# Altium PCB Wikiot-III.PcbDoc (part 2 of 2)
Units mil, origin at the board's own origin, x right, y up, seen from the top; angles counter-clockwise.
Board outline 3930 x 3935 mil, 2 copper layers (Top Layer, Bottom Layer); 211 components, 261 nets, 942 pads, 236 vias.
Unrouted connection lines stored in the file: 45.
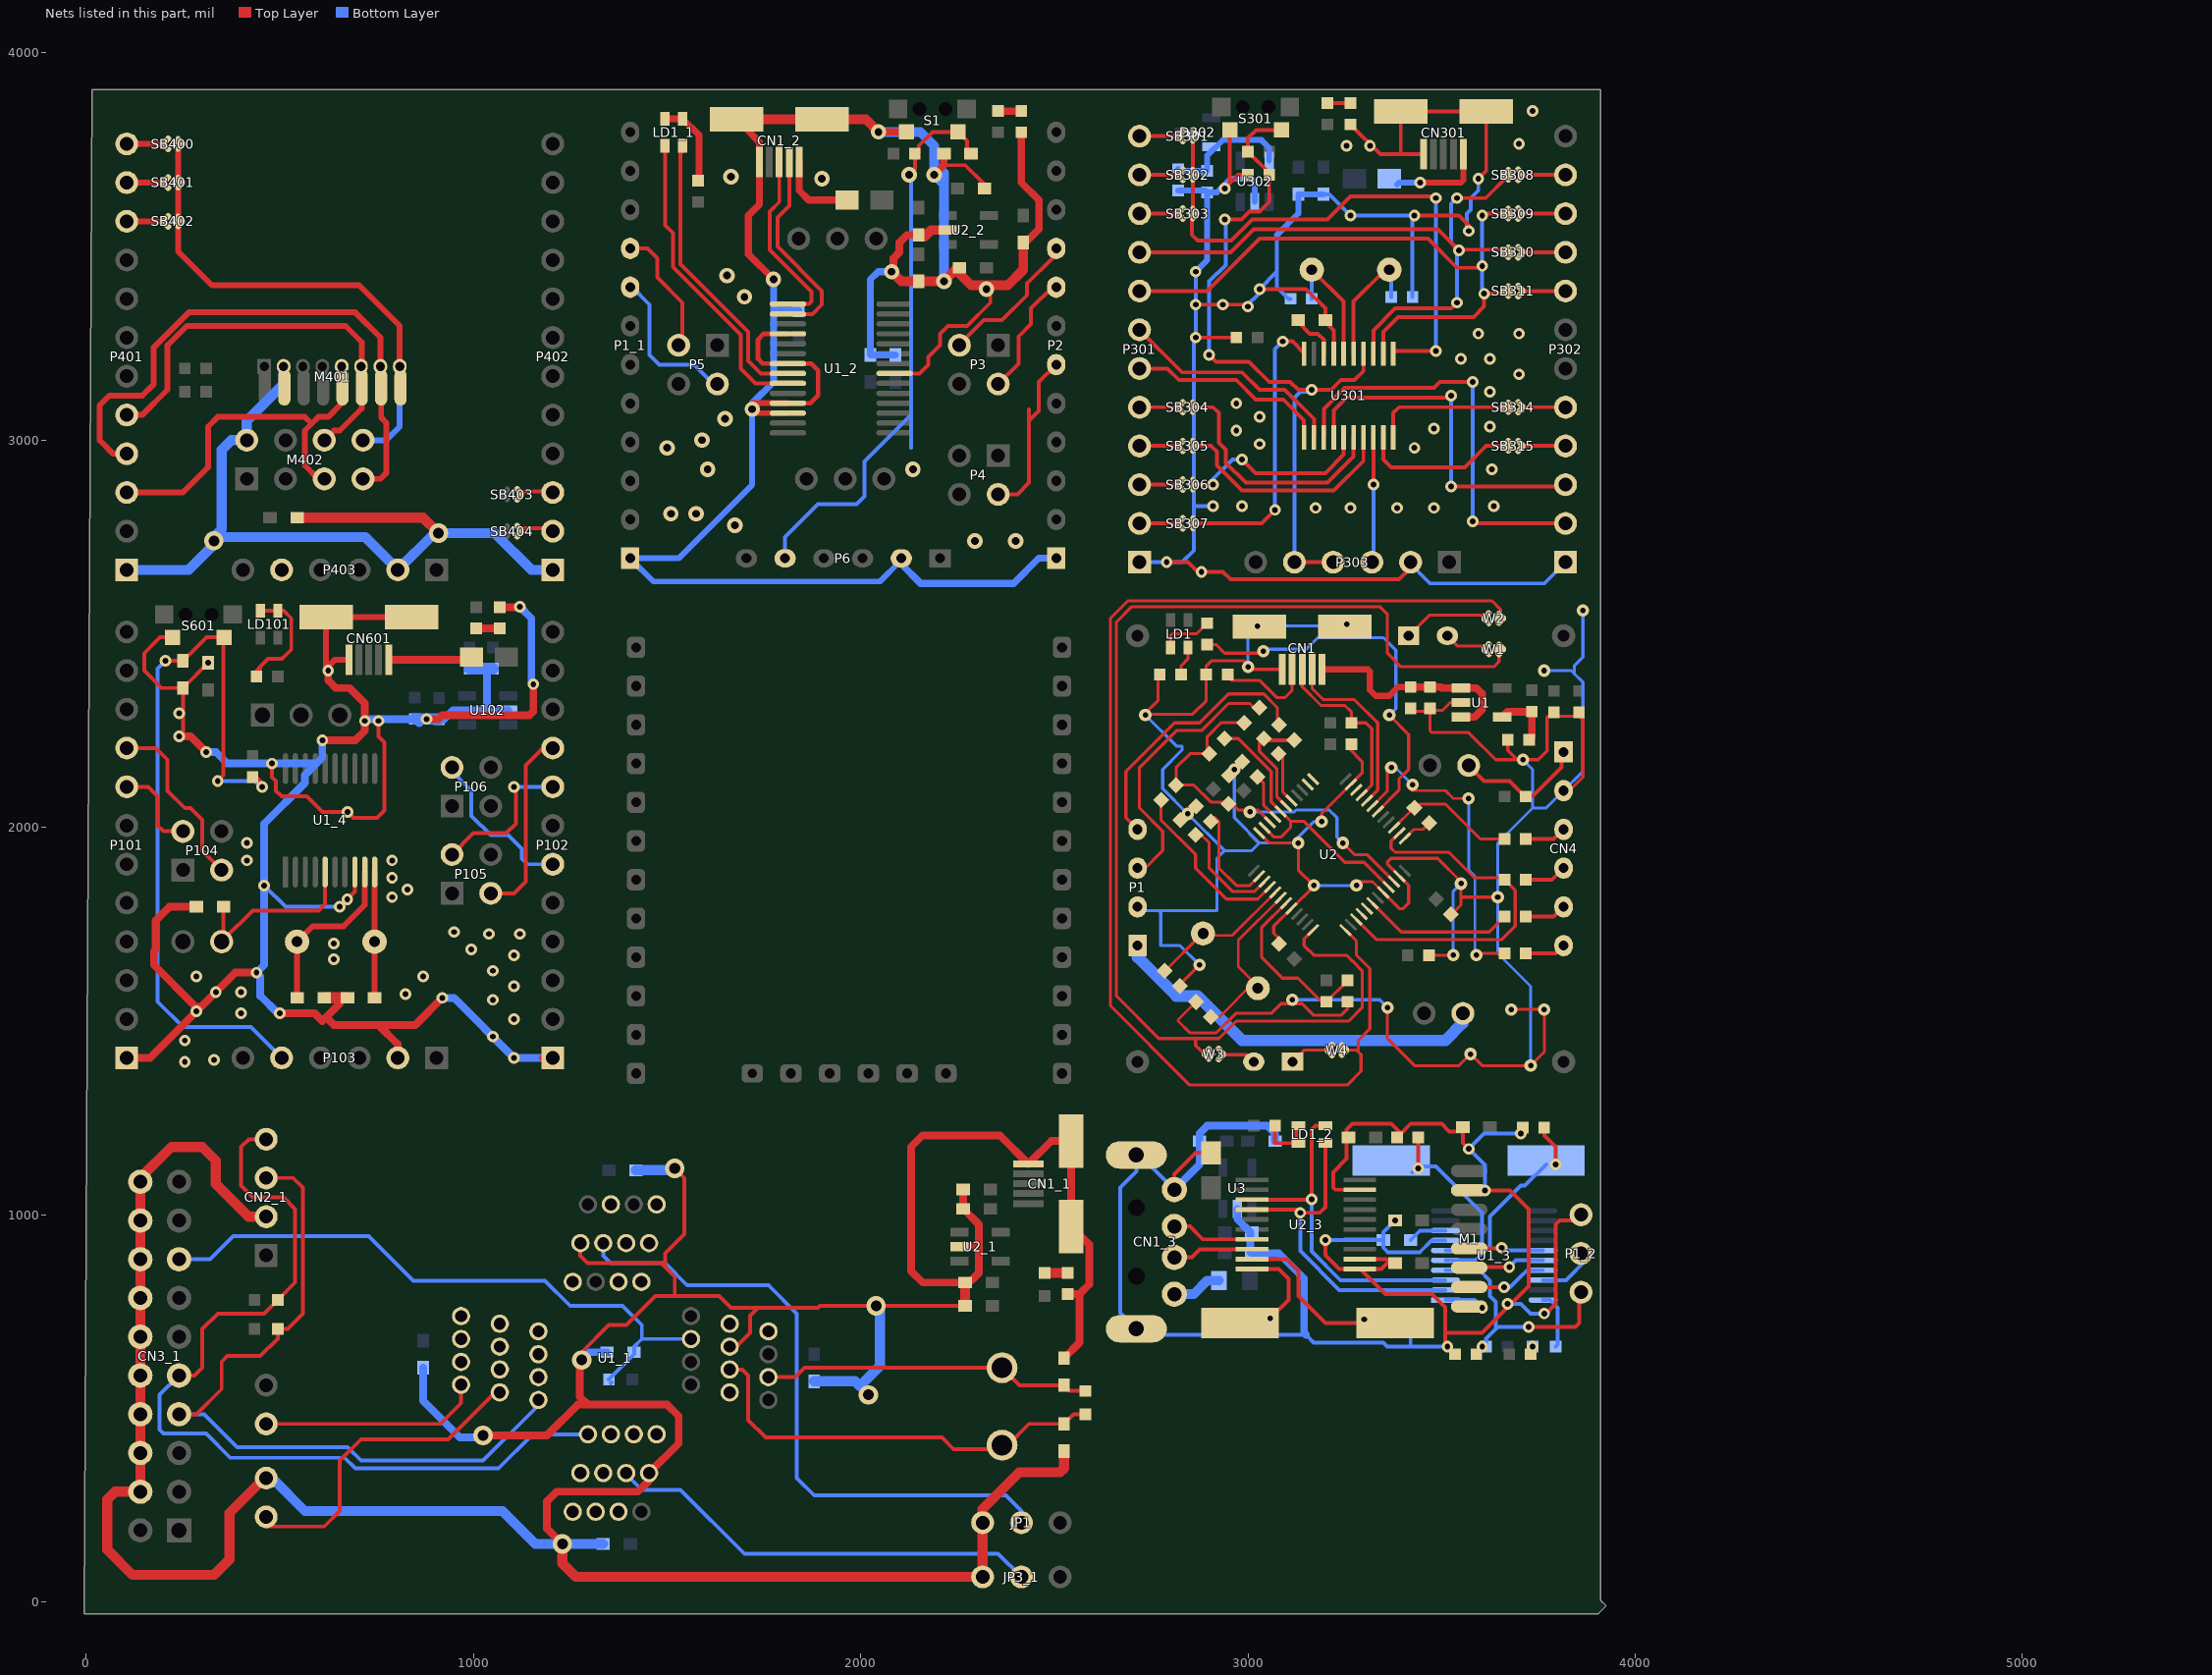
[diagram p2: the nets of this part, all layers, seen from the top]

## Via types
v1: diameter 30, hole 15, Top Layer to Bottom Layer, 149 vias
v2: diameter 32, hole 14, Top Layer to Bottom Layer, 43 vias
v3: diameter 40, hole 20, Top Layer to Bottom Layer, 28 vias
v4: diameter 50, hole 28, Top Layer to Bottom Layer, 16 vias

## Nets (pads, with @x,y where several pads share a name; then routed paths per layer and width w, separated by ;. In a path a pad name is that pad's centre, name@x,y a point inside that pad or via, vN(x,y) a via of type N, cw(c..) or ccw(c..) an arc to the next point about the centre after c; other vN are vias at no path point) (continued)
GND: C1.1 C1_1.1 C1_2.1 C1_3.2 C1_4.1 C2.1 C2_1.1 C2_2.1 C2_3.2 C2_4.2 C3.2 C3_1.1 C3_2.1 C3_3.2 C3_4.2 C4.1 C4_1.1 C4_2.1 C4_3.2 C4_4.2 C5.1 C5_1.1 C5_2.1 C5_3.1 C6.1 C6_1.1 C6_2.1 C6_3.1 C7.1 C7_1.1 C7_2.1 C7_3.1 C8.2 C8_1.1 C8_2.1 C9.1 C9_1.1 C10.1 C11.1 C11_1.1 C12.1 C12_1.1 C13.2 C13_1.1 C13_2.2 C14.1 C14_1.1 C15.1 C15_1.1 C16.1 C100.1 C101.1 C102.1 C103.1 C301.2 C302.2 C303.2 C304.1 C305.1 C306.1 C307.1 C308.1 C309.1 C400.2 C607.1 CN1.0 CN1.5 CN1_1.0 CN1_1.5 CN1_2.0 CN1_2.5 CN1_3.0 CN1_3.4 CN2_1.2 CN3_1.4 CN3_1.6 CN3_1.8 CN3_1.10 CN3_1.12 CN3_1.14 CN3_1.16 CN3_1.18 CN3_1.20 CN4.2 CN301.0 CN301.5 CN601.0 CN601.5 D1.2 D1_1.2 D106.2 D303.2 JP1.3 JP3_1.3 M1.2 M401.2 M402.2 P1.2 P1_1.1 P1_2.1 P2.1 P6.2 P101.1 P102.1 P103.2 P301.1 P302.1 P303.2 P401.1 P402.1 P403.2 R2.1 R3.1 R6.1 R9.2 R15.2 R21.1 R29.1 S1.1 S301.1 S601.1 SB4.2 U1.2 U1_1.8 U1_1.23 U1_1.47 U1_2.7 U1_2.18 U1_2.21 U1_2.25 U1_2.26 U1_3.7 U1_4.8 U2.8 U2.20 U2.23 U2.35 U2.47 U2_1.2 U2_2.2 U2_3.11 U2_3.12 U2_3.19 U3.2 U102.2 U301.7 U302.2 | length 45111.9
  Top Layer w8: R21.1@2772.5,2395 2767.5,2390 2767.5,2327.5 2732.5,2292.5 2857.5,2292.5 2892.5,2327.5 R15.2@2892.5,2390 ; 2820,1500 2850,1470 2918.79,1470 2968.79,1520 3060,1520 3085,1545 3140,1545 3170,1515 3240,1515 3257.5,1532.5 C6.1@3257.5,1550 ; 2820,1503.89 C8.2@2865.55,1549.45 ; C3.2@2824.45,1590.56 2824.45,1594.45 v2(2875,1645) ; R15.2@2892.5,2395 2892.5,2417.5 2905,2430 2990,2430 3011.86,2408.14 CN1.5@3088.76,2408.14 ; R6.1@2985.55,2174.45 R6.1@2990.56,2174.45 ; U2.47@3029.05,1985.68 3054.73,1960 v2(3130,1960) 3130,1890 v2(3170,1850) 3170,1848.24 U2.8@3112.56,1790.81 3066.56,1744.8 3066.56,1726.98 3080.56,1712.98 C7.1@3080.56,1699.45 ; v2(3190,2015) 3190,2035.28 U2.35@3265.68,2110.95 3295,2140.28 3295,2170 C1.1@3260,2205 ; C6.1@3262.5,1547.5 C6.1@3262.5,1550 ; v2@3285,1860 3321.76,1860 U2.20@3349.19,1832.56 3391.76,1790 3400,1790 3415,1805 3415,1850.28 U2.23@3390.95,1874.32 3360,1905.28 3360,1911 3369,1920 3490,1920 3550,1860 3550,1815 ; v2(3360,1535) 3360,1455 3430,1385 3545,1385 v2(3575,1415) 3605,1385 v2(3730,1385) 3765,1420 v2(3765,1530) v2(3680,1530) ; C2.1@3420,2307.5 3420,2300 C5.1@3470,2300 ; R9.2@3467.5,1670 v2(3530,1670) ; C5.1@3470,2307.5 C5.1@3470,2302.5 ; C11.1@3524.45,1775.56 3525.56,1775.56 3550,1800 3550,1815 ; U1.2@3550,2322.6 3522.6,2322.6 3502.5,2302.5 C5.1@3470,2302.5 ; v2(3645,1820) 3555,1820 3550,1815 ; R29.1@3671,2226 3671,2199 v2@3695,2175 ; v2@3760,2400 3765,2395 v2(3765,2405) ; C12.1@3775,2287.5 3772.5,2285 3772.5,2197.5 3750,2175 v2(3710,2175) v2@3695,2175 ; C12.1@3785,2287.5 C13.2@3850,2287.5 ; CN4.2@3815,2095 3830,2095 3865,2130 3865,2277.5 C13.2@3855,2287.5 ; C5.1@3470,2300 3470,2250 3475,2245 3570,2245 3640,2175 v2@3695,2175 ; C5.1@3470,2300 C5.1@3470,2302.5
  Top Layer w10: S601.1@223.07,2490.94 190.94,2490.94 150,2450 150,2405 195,2360 C607.1@250,2360 ; v1(240,2235) 250,2245 C607.1@250,2360 ; v1(315,2425) C607.1@250,2360 ; v1(480,2165) 480,2130 490,2120 490,2095 505,2080 570,2080 610,2040 v1(675,2040) 690,2025 751.72,2025 770,2043.28 770,2220 755,2235 v1(755,2275) ; v1(655,1795) 694.13,1834.13 U1_4.8@694.13,1885 ; U1_1.23@1276.42,926.85 1276.42,893.58 1295,875 1485,875 1495,865 ; v4(1280,625) 1280,645 1350,715 1395,715 1470,790 1520,790 ; v4(1520,1120) 1545,1095 1545,950 1495,900 1495,865 ; U1_1.8@1661.85,659.53 1679.53,659.53 1715,695 1715,740 1735,760 ; U1_2.7@2087.8,3172.2 2152.2,3172.2 2175,3195 2175,3215 2205,3245 2205,3275 2225,3295 2275,3295 2335,3355 v3@2335,3400 ; 2215,3710 2270,3710 C1_2.1@2320,3660 ; C1_1.1@2270,765 v4(2040,765) 1895,765 1890,760 1735,760 ; v1(2790,2685) 2845,2685 2870,2660 v1(2880,2660) 2935.47,2660 2955,2640.47 3390.47,2640.47 3420,2670 P303.2@3420,2685 ; CN1_3.4@2810,1065 2810,1105 2865,1160 C13_2.2@2905,1160 ; v1(2865,3265) C309.1@2970,3265 ; v1(2865,3350) v1(2935,3350) 2995,3350 v1(3000,3345) ; v1(2940,3650) 2953.07,3663.07 ; S301.1@2953.07,3800.94 2953.07,3663.07 ; C308.1@3000,3685 2975,3685 2953.07,3663.07 ; v1(3030,3390) 3150,3390 3200,3340 C303.2@3200,3310 ; v1(3200,935) 3200,895 3235.16,859.84 U2_3.11@3288.94,859.84 U2_3.11@3290.16,859.84 ; C303.2@3200,3305 3221.61,3283.39 U301.7@3221.61,3223.27 ; D303.2@3265,3815 3341.86,3738.14 3396.86,3738.14 ; U2_3.12@3288.94,885.43 3357.07,885.43 3367.5,875 3360,875 3344.84,859.84 U2_3.11@3290.16,859.84 ; U2_3.19@3288.94,1064.57 3225.43,1064.57 3220,1070 3220,1110 3255,1145 3255,1220 3270,1235 3370,1235 3395,1210 3420,1235 3500,1235 3520,1215 3550,1215 3555,1220 3555,1185 v1(3570,1170) ; v1(3430,3580) 3545,3580 3570,3555 v1(3570,3540) ; CN301.5@3453.76,3738.14 3396.86,3738.14 ; C12_1.1@3535,635 3510,660 v1(3515,660) 3508.98,666.02 3508.98,695 ; v1(3595,3675) 3615.17,3695.17 CN301.0@3615.17,3848.46 CN301.0@3394.7,3848.46 3394.7,3740.3 3396.86,3738.14 ; v1(3611.89,1063.11) 3676.89,1063.11 3725,1015 3725,815 3605,695 3508.98,695 ; v1(3705,1210) C2_3.2@3720,1225 ; C2_3.2@3710,1225 C2_3.2@3710,1230 ; v1(3765,745) 3765,740 3795,770 3795,975 3805,985 P1_2.1@3845,985 ; P1_2.1@3860,1000 P1_2.1@3845,985 ; P1_2.1@3875,985 P1_2.1@3845,985 ; 1495,865 1520,840 1520,790 ; 1520,790 1635,790 1665,760 1735,760 ; U2_3.11@3290.16,859.84 3355,795 3475,795 3508.98,761.02 3508.98,695
  Top Layer w12: U1_2.25@1812.2,3095.43 1870,3095.43 1890,3115.43 1890,3180 1872.2,3197.8 U1_2.21@1812.2,3197.8 1747.2,3197.8 1735,3210 1735,3260 1749.57,3274.57 U1_2.18@1812.2,3274.57
  Top Layer w15: CN601.5@678.76,2433.14 642.54,2433.14 619.7,2410.3 CN601.0@619.7,2543.46 CN601.0@840.17,2543.46 ; v3@1710,3085 1720.43,3095.43 U1_2.25@1812.2,3095.43 ; v3@1715.16,3069.84 U1_2.26@1812.2,3069.84
  Top Layer w18: CN1_2.0@1696.58,3811.58 1738.76,3769.4 CN1_2.5@1738.76,3718.14 1738.76,3608.76 1710,3580 1710,3480 v3(1775,3415)
  Top Layer w19: v3(2045.94,3795.94) S1.1@2118.07,3795.94 ; v3(2190,3685) 2215,3710 C9.1@2215,3740 ; D1_1.2@2415,3795 2415,3665 2460,3620 2460,3545 C6_2.1@2420,3505
  Top Layer w20: P101.1@105,1405 165,1405 297.5,1537.5 ; v1(240,2235) 270,2235 v1(310,2195) ; C2_4.2@285,1795 215,1795 180,1760 180,1685 175,1680 175,1645 282.5,1537.5 297.5,1537.5 ; v1(440,1625) 385,1625 297.5,1537.5 ; v1(500,1520) 590,1520 610,1500 620,1510 ; v1(610,2225) 695,2225 720,2250 v1(720,2275) 720,2320 680,2360 645,2360 625,2380 v1(625,2405) ; 655,1560 655,1545 620,1510 ; P103.2@805,1405 805,1440 755,1490 ; v1(879.58,2280) 910,2280 920,2290 1145,2290 1155,2300 v1(1155,2370) ; v1(920,1560) 850,1490 755,1490 ; v4(1025,430) 1190,430 1270,510 1295,510 ; D106.2@1068.36,2568.92 1118.92,2568.92 v1(1120,2570) ; P102.1@1180,1405 P102.1@1205,1405 ; v4(1230,150) 1190,190 1190,260 1215,285 1425,285 1453.58,313.58 U1_1.47@1453.58,333.15 1530,409.57 1530,480 1500,510 1295,510 ; v4(1280,625) 1275,625 1275,530 1295,510 ; v3@2085,3430 2085,3470 2100,3485 2100,3510 2120,3530 C8_1.1@2150,3530 ; U2_1.2@2255,917.6 2297.4,917.6 2305,910 ; C4_1.1@2265,1065 C2_1.1@2265,1015 2305,975 2305,910 ; C5_1.1@2270,815 2305,850 2305,910 ; C5_1.1@2280,825 2160,825 2130,855 2130,1175 2160,1205 2359.39,1205 CN1_1.5@2433.14,1131.24 ; CN1_1.5@2438.45,1136.55 2492.2,1190.3 CN1_1.0@2543.46,1190.3 CN1_1.0@2543.46,969.83 2590,923.28 2590,820 2565,795 ; C7_1.1@2525,630 2565,670 2565,795 ; D1.2@2535,795 2565,795 ; 620,1510 640,1490 755,1490
  Top Layer w25: CN1_2.0@1696.58,3811.58 CN1_2.0@1679.7,3828.46 CN1_2.0@1900.17,3828.46 2013.43,3828.46 v3(2045.94,3795.94) ; v3@2085,3430 2105,3410 C7_2.1@2150,3410 v3(2215,3410) C5_2.1@2252.5,3447.5 ; 2165,3525 2182.6,3542.6 U2_2.2@2225,3542.6 ; C5_2.1@2255,3430 2285,3400 2335,3400 2380,3400 2420,3440 C6_2.1@2420,3505
  Top Layer w26: v4(330,2740) v4@330,2750 ; SB4.2@465,320 460,320 370,230 370,200 370,110 330,70 245,70 120,70 55,135 55,265 75,285 CN3_1.4@140,285 CN3_1.6@140,385 CN3_1.8@140,485 CN3_1.10@140,585 CN3_1.12@140,685 CN3_1.14@140,785 CN3_1.16@140,885 CN3_1.18@140,985 CN3_1.20@140,1085 140,1095 220,1175 300,1175 335,1140 335,1080 420,995 CN2_1.2@465,995 ; C400.2@545,2800 870,2800 v4(910,2760) ; v4(1230,150) 1230,100 1265,65 JP3_1.3@2315,65 JP1.3@2315,205 2315,240 2410,335 2515,335 2525,345 C6_1.1@2525,390 ; C1_1.1@2270,765 C5_1.1@2270,815
  Top Layer w30: C3_4.2@615,1560 655,1560 C4_4.2@675,1560
  Bottom Layer w8: P1.2@2715,1795 2725,1785 2770,1785 ; v2(2735,2290) 2815,2210 2830,2210 2830,2200 2780,2150 2780,2100 v2(2845,2035) 2940,1940 ; v2(2875,1645) 2825,1695 2775,1695 2775,1780 2770,1785 ; v2(2965,2150) 2965,2025 3030,1960 ; v2(3000,2415) 3000,2505 3015,2520 v2(3025,2520) 3250,2520 v2(3255,2525) ; v2(3115,1555) 3340,1555 v2(3360,1535) ; v2(3170,1850) v2(3280,1850) ; v2(3190,2015) 3170,2015 3130,1975 v2(3130,1960) 3030,1960 ; v2(3530,1670) 3530,1835 v2(3550,1855) ; v2(3710,2175) 3735,2150 3735,2050 ; v2(3730,1385) 3730,1590 3645,1675 v2(3645,1820) 3645,1960 3735,2050 ; v2(3765,2405) 3835,2405 3842.5,2397.5 ; v2(3865,2560) 3865,2440 3842.5,2417.5 3842.5,2397.5 ; 2770,1785 2920,1785 2920,1920 2940,1940 ; 2940,1940 3010,1940 3030,1960 ; 3735,2050 3770,2050 CN4.2@3815,2095 3865,2145 3865,2375 3842.5,2397.5
  Bottom Layer w10: v1(460,1850) 515,1795 v1(655,1795) ; P301.1@2720,2685 2830,2685 ; v1(2790,2685) 2830,2685 ; CN1_3.4@2810,1065 2720.61,1154.39 CN1_3.0@2711.65,1154.39 2711.65,1111.65 2670,1070 2670,747.23 CN1_3.0@2711.65,705.57 2727.23,690 2930,690 ; v1(2865,3435) v1(2865,3350) v1(2865,3265) 2860,3260 2860,2830 ; v1(2910,2830) 2860,2830 ; C7_3.1@2935,735 2935,695 2930,690 ; v1@2940,3640 v1(2940,3650) ; v1@2995,3345 3030,3380 v1(3030,3390) 3075,3435 ; 3075,3445 3075,3435 ; 3075,3530 3075,3435 ; C302.2@3110,3365 3105,3365 3075,3395 3075,3435 ; C307.1@3195,3635 3210,3635 v1(3265,3580) v1(3430,3580) 3425,3575 C301.2@3425,3370 ; v1(3200,935) C4_3.2@3350,935 ; v1(3380,985) 3350,955 C4_3.2@3350,935 ; C6_3.1@3420,730 3420,665 3415,660 ; P303.2@3420,2685 3420,2680 3470,2630 3765,2630 P302.1@3820,2685 ; U1_3.7@3510,933.54 3474.08,933.54 3444.08,903.54 3361.46,903.54 3350,915 C4_3.2@3350,935 ; v1(3515,660) 3415,660 ; v1(3570,3540) 3565,3545 3565,3585 3575,3595 3575,3625 3595,3645 v1(3595,3675) ; v1(3611.89,1063.11) 3611.89,1128.11 v1(3570,1170) 3610,1210 v1(3705,1210) ; v1(3670,770) 3705,770 3730,745 v1(3765,745) ; 2830,2685 2860,2715 2860,2830 ; 2930,690 3150,690 3170,670 3350,670 3360,660 3415,660
  Bottom Layer w15: v3(1720,3080) 1720,2885 1530,2695 P1_1.1@1405,2695 1465,2635 2050,2635 P6.2@2100,2685 ; P6.2@2105,2680 P6.2@2105,2695 ; C304.1@2820,3645 2890,3645 C305.1@2895,3640 ; v1(2865,3435) 2895,3465 C305.1@2895,3640 ; U302.2@3017.6,3615 3017.6,3667.4 3010,3675 2955,3675 2920,3640 C305.1@2895,3640 ; 3075,3530 3130,3585 C306.1@3130,3635 C307.1@3195,3635
  Bottom Layer w18: v3(1720,3080) 1720,3095 1775,3150 v3(1775,3415) ; 1775,3335 C4_2.1@1840,3335 ; v3(2080,3435) 2045,3435 2025,3415 C2_2.1@2025,3220 C3_2.1@2090,3220 ; P6.2@2105,2680 2155,2630 2395,2630 2460,2695 P2.1@2505,2695
  Bottom Layer w20: v1(310,2195) 335,2195 365,2165 v1(480,2165) 595,2165 ; v1(500,1520) 495,1520 450,1565 450,1615 v1(440,1625) 460,1645 v1(460,1850) 460,2010 565,2115 565,2135 595,2165 ; v1(610,2225) 610,2180 595,2165 ; v1(720,2275) 725,2280 C103.1@848.8,2280 860,2268.8 871.2,2280 v1(879.58,2280) ; C16.1@870,605 870,520 965,425 1020,425 v4(1025,430) ; C102.1@911.44,2278.92 923.92,2278.92 947.6,2302.6 1025,2302.6 ; v1(920,1560) 950,1560 v1(1105,1405) P102.1@1205,1405 ; C100.1@1035,2410 1035,2312.6 1025,2302.6 ; U102.2@1090,2302.6 1025,2302.6 ; v1(1120,2570) 1150,2540 1150,2375 v1(1155,2370) ; v4(1280,625) 1300,645 C3_1.1@1345,645 ; CN1_3.4@2810,1065 2875,1130 C11_1.1@2875,1190 2875,1210 2895,1230 3050,1230 3070,1210 C8_2.1@3070,1190 ; U3.2@2972.6,1015 2972.6,988.68 3006.28,955 3006.28,903.72 C9_1.1@3010,900 3080,900 3145,835 3145,695 3150,690
  Bottom Layer w25: v3(2045.94,3795.94) 2154.06,3795.94 2190,3760 v3(2190,3685) 2215,3660 ; v3(2215,3410) 2215,3690
  Bottom Layer w26: P401.1@105,2665 265,2665 v4@325,2725 ; SB4.2@485,315 565,235 1075,235 1160,150 v4(1230,150) 1235,155 1240,150 C14.1@1335,150 ; M401.2@510,3190 510,3145 415,3050 M402.2@415,3000 375,3000 350,2975 350,2770 325,2745 v4@325,2725 ; v4@925,2760 v4(910,2760) ; P402.1@1205,2665 1150,2665 1055,2760 v4(910,2760) ; C13_1.1@1420,1115 1515,1115 v4(1520,1120) ; C15.1@1880,570 1985,570 1997.5,557.5 2050,610 2050,755 v4(2040,765) ; v4@325,2725 350,2750 720,2750 P403.2@805,2665 900,2760 v4(910,2760)
  Bottom Layer w30: C103.1@848.8,2280 910.36,2280 C102.1@911.44,2278.92 ; C101.1@990,2410 1030,2410 ; C100.1@1035,2410 C100.1@1050,2410
  other v1: 255,1395 330,1400 255,1450 1050,1460 1105,1505 400,1520 285,1525 1050,1555 825,1570 335,1575 400,1575 1105,1590 285,1615 870,1615 1050,1630 640,1660 1105,1670 995,1685 640,1700 1040,1725 1120,1725 950,1730 674.57,1814.57 790,1820 830,1840 790,1870 415,1915 790,1915 415,1960 240,2295 3175,2825 3265,2825 3385,2825 3480,2825 2985,2830 3635,2830 3630,2925 3430,2980 3030,2990 2970,3025 3480,3030 3625,3035 3030,3060 2970,3095 3625,3125 3700,3170 3550,3210 3625,3210 3595,3275 3700,3275 3255,3760 3315,3760 3700,3765 3735,3850
  other v3: 2295,2740 2400,2740 1675,2780 1510,2810 1575,2810 1605,2925 2135,2925 1500,2980 1590,3000 1650,3055 1700,3370 2325,3390 1655,3425 1900,3675 1665,3680
  other v4: 2020,535
GPIO1: U1_1.2
GPIO2: U1_1.25
GPIO3: U1_1.28
GPIO4: U1_1.27
GPIO5: U1_1.26
GPIO6: JP1.2 U1_1.20 | length 1664
  Bottom Layer w10: U1_1.20@1335.47,926.85 1335.47,894.53 1355,875 1495,875 1552.5,817.5 1762.5,817.5 1835,745 1835,320 1880,275 2375,275 2415,235 JP1.2@2415,205
GPIO7: U1_1.40
INT0: M1.8 M401.8 M402.8 SB400.2 SB401.2 SB402.2 U1_3.1 | length 1433
  Top Layer w10: M1.8@3571.23,763.11 M1.8@3611.89,763.11
  Top Layer w15: SB400.2@238,3755 SB401.2@238,3665 238,3487 325,3400 705,3400 810,3295 M401.8@810,3190
  Bottom Layer w10: U1_3.1@3510,780 3585,780 v1(3605,760)
  Bottom Layer w15: M402.8@715,3000 775,3000 810,3035 M401.8@810,3190
LDR_AD: 
LED: R3_2.1 U1_3.20 | length 148.4
  Bottom Layer w10: U1_3.20@3761.97,780 3780,780 3800,760 3800,665 R3_2.1@3795,660
LED_STLINK: R20.1 U2.30 | length 1003.6
  Top Layer w8: R20.1@2895,2472.5 2917.5,2472.5 2940,2450 3035,2450 v2(3040,2455) ; U2.30@3335.28,2041.36 3390,2096.08 3390,2125 3415,2150 3415,2240 v2(3365,2290)
  Bottom Layer w8: v2(3040,2455) 3045,2460 3150,2460 3180,2490 3350,2490 3382,2458 3382,2307 v2(3365,2290)
MISO: M1.7 M401.7 M402.7 P401.4 U1_3.17 | length 1658
  Top Layer w10: M1.7@3571.23,813.11 v1(3661.89,813.11)
  Top Layer w15: P401.4@105,2965 70,2965 35,3000 35,3090 60,3115 145,3115 175,3145 175,3239.7 265.3,3330 695,3330 760,3265 M401.7@760,3190 ; M402.7@715,2900 760,2900 775,2915 775,3045 761.89,3058.11 M401.7@761.89,3136.23
  Bottom Layer w10: v1(3661.89,813.11) 3676.95,813.11 3705,841.16 3720.61,856.77 U1_3.17@3761.97,856.77
MOSI: M1.6 M401.6 M402.6 P401.5 U1_3.16 | length 1287.6
  Top Layer w10: M1.6@3571.23,863.11 3573.12,865 v1(3675,865)
  Top Layer w15: P401.5@105,3065 145,3065 210,3130 210,3245 260,3295 670,3295 711.89,3253.11 M401.6@711.89,3136.23 711.89,3081.89 655,3025 640,3025 M402.6@615,3000
  Bottom Layer w10: v1(3675,865) 3692.36,882.36 U1_3.16@3761.97,882.36
NACT: 
NetC2_1: C2_3.1 C2_4.1 JP1_2.1 U1_3.5 U1_4.5 X1_1.2 | length 989.3
  Top Layer w10: JP1_2.1@350,1705 JP1_2.1@355,1710 ; C2_4.1@355,1795 JP1_2.1@355,1710 ; U1_4.5@617.36,1885 617.36,1802.36 600,1785 430,1785 JP1_2.1@355,1710 ; C2_3.1@3765,1225 3765,1205 3795,1175 v1(3795,1130)
  Bottom Layer w10: U1_3.5@3510,882.36 3587.36,882.36 3625,920 3625,995 3705,1075 3715,1075 X1_1.2@3770,1130
NetC3_1: C3_3.1 C3_4.1 U1_3.6 U1_4.9 X1_1.1 Y1_1.2 | length 939.3
  Top Layer w10: v1(3440,1120) C3_3.1@3440,1200
  Top Layer w15: C3_4.1@545,1560 Y1_1.2@545,1705 585,1745 665,1745 719.72,1799.72 U1_4.9@719.72,1885
  Bottom Layer w10: X1_1.1@3425,1110 3440,1125 3485,1125 3605,1005 3605,930 3582.95,907.95 U1_3.6@3510,907.95
NetC4_1: C4_3.1 C4_4.1 U1_3.8 U1_4.10 Y1_1.1 | length 425.1
  Top Layer w15: C4_4.1@745,1560 Y1_1.1@745,1705 745.32,1705.32 U1_4.10@745.32,1885
  Bottom Layer w10: C4_3.1@3420,935 3444.13,959.13 U1_3.8@3510,959.13
NetC6_2: C6_1.2 C6_3.2 R6_1.1 U1_1.5 U2_3.9 X2.2 Y1.1 | length 1687.6
  Top Layer w10: U1_1.5@1661.85,600.47 1694.53,600.47 1710,585 1710,470 1755,425 2210,425 2240,395 2355,395 X2.2@2365,405 2380,405 2435,460 C6_1.2@2525,460 2550,485 R6_1.1@2580,485 ; U2_3.9@3011.06,885.43 3099.57,885.43 3130,855 3130,790 3200,720 Y1.1@3300,720 ; v1(3300,730) 3370,730 Y1.1@3380,720 ; Y1.1@3300,750 Y1.1@3350,750
  Bottom Layer w10: v1(3300,730) C6_3.2@3350,730
NetC7_2: C7_1.2 C7_3.2 R6_1.2 U1_1.6 U2_3.10 X2.1 Y1.2 | length 1140
  Top Layer w10: U1_1.6@1761.85,580.79 1830.79,580.79 1855,605 X2.1@2365,605 2410,560 C7_1.2@2525,560 2540,545 R6_1.2@2580,545 ; U2_3.10@3011.06,859.84 3080.16,859.84 3105,835 3105,780 v1(3057.5,732.5)
  Bottom Layer w10: C7_3.2@3005,735 3025,735 3030,730 3060,730 v1(3057.5,732.5)
NetC112_2: 
NetC113_2: 
NetC301_1: C301.1 U301.5 X301.2 | length 357.9
  Top Layer w10: U301.5@3272.8,3223.27 3272.8,3357.8 3355,3440 X301.2@3365,3440 X301.2@3365,3415
  Bottom Layer w10: X301.2@3365,3440 3370,3435 C301.1@3370,3370
NetC302_1: C302.1 U301.6 X301.1 | length 325.8
  Top Layer w10: X301.1@3165,3440 3247.2,3357.8 U301.6@3247.2,3223.27
  Bottom Layer w10: C302.1@3165,3365 X301.1@3165,3440
NetC303_1: C303.1 U301.8 | length 120.8
  Top Layer w10: C303.1@3130,3305 3160,3275 3180,3275 3196.02,3258.98 U301.8@3196.02,3223.27
NetC304_2: C304.2 C305.2 D302.2 U302.5 | length 335.6
  Bottom Layer w15: C304.2@2820,3700 2825,3695 C305.2@2895,3695 2895,3735 2935,3775 3035,3775 3055,3755 U302.5@3055,3721.3
NetC601_2: 
NetC605_2: 
NetC606_2: 
NetC607_1: 
NetC701_2: 
NetC702_2: 
NetC703_2: 
NetC802_1: 
NetC803_1: 
NetCN1_1: CN1_2.1 CN1_3.1 F1.2 F1_1.2 | length 336.9
  Top Layer w18: CN1_2.1@1841.12,3718.14 1841.12,3645 1866.12,3620
  Top Layer w20: 1866.12,3620 F1.2@1965,3620
  Bottom Layer w25: CN1_3.1@2810,795 2860,795 2895,830 F1_1.2@2925,830
NetCN1_2: CN1_2.2 CN1_3.2 U1_2.16 U2_3.8 | length 736
  Top Layer w10: U1_2.16@1812.2,3325.75 1875.75,3325.75 1900,3350 1900,3385 1785,3500 1785,3575 1815.53,3605.53 CN1_2.2@1815.53,3718.14 ; CN1_3.2@2810,890 2855,890 2876.02,911.02 U2_3.8@3011.06,911.02
NetCN1_3: CN1_2.3 CN1_3.3 U1_2.15 U2_3.7 | length 693.8
  Top Layer w10: CN1_2.3@1789.94,3718.14 1789.94,3614.94 1765,3590 1765,3491.72 1873.17,3383.55 1873.17,3358.17 1866.34,3351.34 U1_2.15@1812.2,3351.34 ; CN1_3.3@2810,970 2850,970 2883.39,936.61 U2_3.7@3011.06,936.61
NetCN1_4: CN1.4 R15.1 | length 251.4
  Top Layer w8: R15.1@2947.5,2390 2957.5,2380 3030,2380 3075,2335 3095,2335 3114.35,2354.35 CN1.4@3114.35,2408.14
NetCN2_1: CN2.1 W2.1 | length 224
  Top Layer w8: CN2.1@3415,2495 3468,2548 W2.1@3617,2548
NetCN2_2: CN2.2 W1.1 | length 113.2
  Top Layer w8: CN2.2@3515,2495 3542,2468 W1.1@3617,2468
NetCN3_1: CN3.1 W4.1 | length 112.7
  Top Layer w8: CN3.1@3115,1395 3145,1425 3204,1425 W4.1@3212,1433
NetCN3_2: CN3.2 W3.1 | length 79.5
  Top Layer w8: W3.1@2943,1413 2997,1413 CN3.2@3015,1395
NetCN4_1: CN4.1 JP2.2 R1.2 | length 347.3
  Top Layer w10: JP2.2@3570,2160 3610,2120 3675,2120 R1.2@3717.5,2077.5 ; R1.2@3717.5,2080 3735,2080 3810,2155 3810,2190 CN4.1@3815,2195
NetCN4_3: CN4.3 R5.1 | length 107.9
  Top Layer w10: R5.1@3717.5,1970 3790,1970 CN4.3@3815,1995
NetCN4_4: CN4.4 R8.1 | length 109.9
  Top Layer w10: R8.1@3717.5,1865 3785,1865 CN4.4@3815,1895
NetCN4_5: CN4.5 R13.1 | length 107.9
  Top Layer w10: R13.1@3717.5,1770 3790,1770 CN4.5@3815,1795
NetCN4_6: CN4.6 R10.1 | length 105.8
  Top Layer w10: R10.1@3717.5,1675 3795,1675 CN4.6@3815,1695
NetCN101_1: 
NetCN101_2: 
NetCN101_3: 
NetCN301_1: CN301.1 F301.2 | length 242.7
  Top Layer w15: v1(3445,3665) 3550,3665 3556.12,3671.12 CN301.1@3556.12,3738.14
  Bottom Layer w15: F301.2@3385,3660 3390,3665 v1(3445,3665)
NetCN601_1: CN601.1 F601.2 | length 207.8
  Top Layer w20: 790,2433.14 988.14,2433.14 F601.2@995,2440
NetCN601_2: 
NetCN601_3: 
NetD1_1: D1.1 D1_1.1 R2_1.1 R10_1.2 | length 110
  Top Layer w19: R2_1.1@2355,3850 D1_1.1@2415,3850
  Top Layer w25: R10_1.2@2480,850 D1.1@2530,850
NetD1_2: D1_2.2 R3_2.2 | length 22.1
  Top Layer w10: D1_2.2@3730,640 3730,655 v1(3735,660)
NetD106_1: D106.1 R101.1 | length 61
  Top Layer w20: R101.1@1007.36,2513.92 D106.1@1068.36,2513.92
NetD303_1: D303.1 R303.1 | length 60
  Top Layer w10: R303.1@3205,3870 D303.1@3265,3870
NetD601_2: 
NetD702_2: 
NetJP1_2: 
NetJP3_2: JP3.2 JP3_1.2 P1.1 U1_1.44 | length 2141.8
  Bottom Layer w10: U1_1.44@1394.53,333.15 1394.53,330.47 1435,290 1535,290 1700,125 2355,125 JP3_1.2@2415,65
  Bottom Layer w30: P1.1@2715,1695 2715,1665 2815,1565 2870,1565 2985,1450 3510,1450 3555,1495 JP3.2@3555,1520 ; JP3.2@3552.5,1520 3552.5,1522.5 JP3.2@3555,1525
NetJP4_2: 
NetJP801_2: 
NetLD1_1: LD1.1 R21.2 | length 82.2
  Top Layer w8: R21.2@2827.5,2395 2827.5,2417.5 2845,2435 LD1.1@2845,2470
NetLD1_2: LD1.2 R20.2 | length 133.5
  Top Layer w7: LD1.2@2800,2470 2800,2495 2805,2500 2867.5,2500 R20.2@2895,2527.5
NetLD1_3: LD1_1.3 LD1_1.4 LD1_2.3 LD1_2.4 R1_1.2 R7_2.2 | length 368.6
  Top Layer w10: R7_2.2@3070,1230 3070,1185 LD1_2.3@3130,1185 ; LD1_2.3@3125,1185 LD1_2.4@3125,1230
  Top Layer w18: LD1_1.3@1500,3830 LD1_1.4@1540,3830 1582.5,3787.5 1582.5,3672.5 R1_1.2@1580,3670
NetLD101_3: LD101.3 LD101.4 R102.2 | length 305.2
  Top Layer w10: LD101.3@450,2560 LD101.4@495,2560 510,2560 530,2540 530,2460 515,2445 505,2435 470,2435 450,2415 ; 450,2415 450,2410 440,2400 440,2405 450,2415
NetLD601_3: 
NetM401_3: 
NetP1_3: P1.3 R18.2 | length 692.7
  Top Layer w8: P1.3@2730,1890 2780,1940 2780,1990 2720,2050 2720,2155 2815,2250 2880,2250 2950,2320 3005,2320 3015.55,2309.45 R18.2@3029.45,2309.45
NetP1_4: P1.4 R22.2 | length 705.9
  Top Layer w8: P1.4@2715,1995 2685,2025 2685,2145 2810,2270 2875,2270 2950,2345 3040.55,2345 3075.55,2310 R22.2@3075.55,2259.45 ; P1.4@2725,2005 P1.4@2730,2005
NetP201_6: 
NetP201_7: 
NetP201_11: 
NetP201_12: 
NetP202_2: 
NetP202_3: 
NetP202_4: 
NetP202_6: 
NetP202_7: 
NetP202_10: 
NetP202_11: 
NetP301_2: P301.2 SB307.1 | length 110.1
  Top Layer w10: P301.2@2720,2785 2818.4,2785 SB307.1@2826.7,2776.7
NetP301_3: P301.3 SB306.1 | length 110.1
  Top Layer w10: P301.3@2720,2885 2818.4,2885 SB306.1@2826.7,2893.3
NetP301_4: P301.4 SB305.1 | length 93.4
  Top Layer w10: P301.4@2720,2985 2813.4,2985
NetP301_5: P301.5 SB304.1 | length 108.1
  Top Layer w10: P301.5@2720,3085 2823.4,3085 SB304.1@2826.7,3088.3
NetP301_10: P301.10 SB303.1 | length 110.1
  Top Layer w10: P301.10@2720,3585 2818.4,3585 SB303.1@2826.7,3593.3
NetP301_11: P301.11 SB302.1 | length 110.1
  Top Layer w10: P301.11@2720,3685 2818.4,3685 SB302.1@2826.7,3693.3
NetP301_12: P301.12 SB301.1 | length 110.1
  Top Layer w10: P301.12@2720,3785 2818.4,3785 SB301.1@2826.7,3776.7
NetP302_4: P302.4 SB315.1 | length 118.1
  Top Layer w10: SB315.1@3703.3,2988.3 3706.6,2985 P302.4@3820,2985
NetP302_5: P302.5 SB314.1 | length 120.1
  Top Layer w10: SB314.1@3703.3,3093.3 3711.6,3085 P302.5@3820,3085
NetP302_8: P302.8 SB311.1 | length 110
  Top Layer w10: SB311.1@3710,3385 P302.8@3820,3385
NetP302_9: P302.9 SB310.1 | length 120.1
  Top Layer w10: SB310.1@3703.3,3493.3 3711.6,3485 P302.9@3820,3485
NetP302_10: P302.10 SB309.1 | length 120.1
  Top Layer w10: SB309.1@3703.3,3593.3 3711.6,3585 P302.10@3820,3585
NetP302_11: P302.11 SB308.1 | length 120.1
  Top Layer w10: SB308.1@3703.3,3693.3 3711.6,3685 P302.11@3820,3685
NetP401_10: P401.10 SB402.1 | length 99
  Top Layer w15: P401.10@105,3565 SB402.1@204,3565
NetP401_11: P401.11 SB401.1 | length 105.3
  Top Layer w15: P401.11@105,3665 199,3665 SB401.1@207,3673
NetP401_12: P401.12 SB400.1 | length 95
  Top Layer w15: P401.12@105,3765 SB400.1@200,3765
NetP402_2: P402.2 SB404.1 | length 90.3
  Top Layer w10: SB404.1@1118,2773 1197,2773 P402.2@1205,2765
NetP402_3: P402.3 SB403.1 | length 88.2
  Top Layer w10: SB403.1@1118,2868 1202,2868 P402.3@1205,2865
NetP701_6: 
NetP701_7: 
NetP701_10: 
NetP701_11: 
NetP701_12: 
NetP801_2: 
NetP801_3: 
NetP801_4: 
NetP801_5: 
NetP801_10: 
NetP801_11: 
NetP801_12: 
NetP802_4: 
NetP802_5: 
NetP802_6: 
NetP802_7: 
NetP802_8: 
NetP802_9: 
NetP802_10: 
NetP802_11: 
NetR2_2: R2.2 U2.3 | length 279.7
  Top Layer w8: R2.2@2874.45,1985.56 2900,1960 2900,1894.54 2959.54,1835 3017.56,1835 U2.3@3042.97,1860.4
NetR3_2: R3.2 U2.2 | length 267.5
  Top Layer w8: R3.2@2914.45,2025.55 2925,2015 2925,1895 2969.77,1850.23 3004.95,1850.23 U2.2@3029.05,1874.32
NetR6_2: R6.2 U2.44 | length 122.3
  Top Layer w8: R6.2@3024.45,2130.56 3040,2115 3040,2058.24 U2.44@3070.81,2027.44
NetR10_2: 
NetR16_2: 
NetR28_2: R28.2 R29.2 U1.4 | length 158.3
  Top Layer w20: U1.4@3656.3,2285.2 3670.1,2299 R28.2@3733,2299 3733,2233 R29.2@3726,2226
NetR604_2: 
NetU701_3: 
NRST: C3_1.2 C9.2 C12_1.2 C308.2 C607.2 CN3_1.15 P1_2.3 P6.5 P103.5 P303.4 P303.5 P403.5 R3_1.2 R4_1.1 R5_1.1 R302.1 R603.2 S1.2 S301.2 S601.2 U1_1.7 U1_3.4 U301.4 | length 7643.7
  Top Layer w10: v1(205,2430) C607.2@250,2430 310.94,2490.94 S601.2@356.93,2490.94 355,2489.02 355,2135 v1(340,2120) ; R603.2@440,2130 455,2115 v1(455,2105) ; v3(2125,3685) 2140,3700 R3_1.2@2140,3740 ; R3_1.2@2150,3740 2150,3760 2185.94,3795.94 S1.2@2251.93,3795.94 2275,3772.87 C9.2@2275,3740 ; v1(2900,3220) 2917.5,3202.5 3002.5,3202.5 3055,3150 3108.28,3150 ; v1(2940,3570) 2983.43,3570 3003.43,3590 3030,3590 3055,3615 C308.2@3055,3685 3055,3690 R302.1@3000,3745 3000,3780 3020.94,3800.94 S301.2@3086.93,3800.94 ; 3109.14,3150.86 3130,3130 v1(3165,3130) 3215,3130 3240,3155 3275,3155 3298.39,3178.39 U301.4@3298.39,3223.27 ; P303.5@3120,2685 P303.4@3220,2685 ; C12_1.2@3590,640 3590,645 v1(3605,660) ; v1(3725,710) 3845,710 3855,720 3855,795 P1_2.3@3860,800
  Bottom Layer w10: v1(205,2430) 185,2410 185,1550 250,1485 425,1485 P103.5@505,1405 ; CN3_1.15@240,885 320,885 380,945 730,945 845,830 1185,830 1250,765 1385,765 1435,715 1435,679.21 ; v1(340,2120) 435,2120 455,2100 v1(455,2105) ; R5_1.1@1350,575 1415,640 C3_1.2@1415,645 1415,659.21 1435,679.21 ; R5_1.1@1355,565 R5_1.1@1357.5,567.5 ; U1_1.7@1561.85,679.21 1435,679.21 ; P6.5@1805,2695 1805,2750 1890,2835 1990,2835 2010,2855 2010,2945 2130,3065 ; v3(2125,3685) 2130,3680 2130,2980 ; v1(2900,3220) 2900,3250 2900,3410 2942.5,3452.5 2942.5,3567.5 v1(2940,3570) ; P303.5@3120,2685 3120,3110 3135,3125 3160,3125 v1(3165,3130) ; U1_3.4@3510,856.77 3598.23,856.77 3625,830 3625,790 3640,775 3640,705 ; R4_1.1@3615,660 3615,680 3640,705 ; v1(3725,710) 3645,710 3640,705
OSC_IN: C3.1 U2.5 X1.2 | length 382.1
  Top Layer w7: C3.1@2785.56,1629.45 X1.2@2877.41,1721.31 ; X1.2@2883.97,1731.31 2883.97,1727.87 X1.2@2877.41,1721.31 ; U2.5@3070.81,1832.56 2959.55,1721.31 X1.2@2877.41,1721.31
OSC_OUT: C8.1 U2.6 X1.1 | length 428.8
  Top Layer w7: C8.1@2904.45,1510.55 2926.07,1510.56 3015.28,1599.77 3015.28,1600 2975,1640.28 2975,1708.92 U2.6@3084.73,1818.65
P0.0/AIN0: 
P0.1/AIN1: 
P0.2/AIN2/RX1: 
P0.3/AIN3/TX1: 
P0.4/AIN4/CTS1: 
P0.5/AIN5/RTS1: 
P0.6/AIN6: 
P0.7/AIN7: 
P1.0/T0: 
P1.1/T1: 
P1.2/SS: 
P1.3/SCK: 
P1.4/MISO: 
P1.5/MOSI: 
P1.6/TX0: 
P1.7/RX0: 
P2.0: 
P2.1/DD: 
P2.2/DC: 
PA0/CTS1: 
PA1/RTS1: 
PA2/TX1: 
PA3/RX1: 
PA3/TIM2_CH3/CSN: SB307.2 U301.10 | length 736.8
  Top Layer w10: SB307.2@2863,2792 2870,2785 3035,2785 v1(3070,2820) ; v1(3090,3255) 3115,3255 3144.84,3225.16 U301.10@3144.84,3223.27
  Bottom Layer w10: v1(3070,2820) 3070,3235 v1(3090,3255)
PA4/SS: 
PA5/SCK: 
PA6/MISO: 
PA7/MOSI: 
PA9/SCL1/TX1: 
PA10/SDA1/RX1: 
PB1/TIM3_CH4: 
PB4/SCL1: P301.7 U301.12 | length 593.7
  Top Layer w10: P301.7@2720,3285 2830,3175 2985,3175 3030,3130 3095,3130 3170.43,3054.57 U301.12@3170.43,3006.73
PB5/SDA1: P301.6 U301.11 | length 525.1
  Top Layer w10: P301.6@2720,3185 2791.72,3185 2821.72,3155 2970,3155 3020,3105 3091.72,3105 3144.84,3051.87 U301.11@3144.84,3006.73
PC3/TIM1_CH3: P302.2 U301.13 | length 1088.9
  Top Layer w10: U301.13@3196.02,3006.73 3196.02,3081.02 3250,3135 3480,3135 3495,3150 v1(3580,3150) ; v1(3580,2790) 3585,2785 P302.2@3820,2785
  Bottom Layer w10: v1(3580,2790) v1(3580,3150)
PC4/TIM1_CH4: P302.3 U301.14 | length 921.2
  Top Layer w10: U301.14@3221.61,3006.73 3221.61,3076.61 3255,3110 3520,3110 v1(3525,3115) ; v1(3525,2880) 3815,2880 P302.3@3820,2885
  Bottom Layer w10: v1(3525,2880) v1(3525,3115)
PC5/SCK/TIM2_CH1: SB306.2 U301.15 | length 517.6
  Top Layer w10: SB306.2@2858,2885 v1(2910,2885) ; v1(2985,2950) 3020,2915 3200,2915 3247.2,2962.2 U301.15@3247.2,3006.73
  Bottom Layer w10: v1(2910,2885) 2920,2885 2910,2895 2910,2900 2960,2950 v1(2985,2950)
PC6/MOSI/TIM1_CH1: SB304.2 U301.16 | length 637
  Top Layer w10: SB304.2@2858,3085 2910,3085 2925,3070 2925,2993.28 2943.28,2975 2943.28,2941.72 2995,2890 3205,2890 3272.8,2957.8 U301.16@3272.8,3006.73
PC7/MISO/TIM1_CH2: SB305.2 U301.17 | length 600.4
  Top Layer w10: SB305.2@2858,2985 2905,2985 2920,2970 2920,2935 2985,2870 3221.77,2870 3298.39,2946.61 U301.17@3298.39,3006.73
PD2/AIN3/TIM2_CH3: SB315.2 U301.19 | length 410
  Top Layer w10: U301.19@3349.57,3006.73 3349.57,2950.43 3370,2930 3560,2930 3615,2985 SB315.2@3672,2985
PD3/AIN4/TIM2_CH2: SB314.2 U301.20 | length 366.4
  Top Layer w10: U301.20@3375.16,3006.73 3375.16,3070.16 3390,3085 SB314.2@3672,3085
PD4/BEEP/TIM2_CH1: SB301.2 SB302.2 SB303.2 U301.1 | length 1450.1
  Top Layer w10: SB301.2@2858,3785 SB302.2@2858,3685 2858,3597 SB303.2@2863,3592 ; SB303.2@2863,3578 2855.26,3570.26 2855.26,3562.57 2855,3562.57 2855,3530 2870,3515 2956.72,3515 3011.72,3570 3205,3570 3265,3630 3490,3630 v1(3485,3625) ; U301.1@3375.16,3223.27 3381.89,3230 v1(3485,3230)
  Bottom Layer w10: v1(3485,3230) v1(3485,3625)
PD5/AIN5/TXD: P301.8 SB309.2 SB311.2 U301.2 | length 1695
  Top Layer w10: P301.8@2720,3385 2895,3385 3030,3520 3465,3520 3540,3445 3600,3445 v1(3605,3450) ; U301.2@3349.57,3223.27 3349.57,3279.57 3387.5,3317.5 3582.5,3317.5 3610,3345 v1(3610,3378) SB311.2@3667,3378 ; v1(3605,3580) 3610,3585 SB309.2@3667,3585 ; SB309.2@3667,3578 SB309.2@3667,3585 ; SB309.2@3667,3592 SB309.2@3667,3585 ; SB309.2@3672,3585 SB309.2@3667,3585
  Bottom Layer w10: v1(3605,3580) v1(3605,3450) 3605,3383 v1(3610,3378)
PD6/AIN6/RXD: P301.9 SB308.2 SB310.2 U301.3 | length 1739.1
  Top Layer w10: P301.9@2720,3485 2955,3485 3015,3545 3490,3545 v1(3545,3490) ; U301.3@3323.98,3223.27 3323.98,3283.98 3380,3340 3525,3340 v1(3540,3355) ; v1(3540,3625) 3614,3625 SB308.2@3667,3678 ; v1@3555,3492 SB310.2@3667,3492 ; SB308.2@3660,3685 SB308.2@3667,3692
  Bottom Layer w10: v1(3540,3355) v1@3540,3495 ; v1(3540,3625) 3525,3610 3525,3510 v1(3545,3490)
PF6: SB4.1 U1_1.35 | length 822.8
  Top Layer w10: SB4.1@465,195 615,195 655,235 655,365 710,420 935,420 1056.42,541.42 U1_1.35@1068.15,541.42
PF7: SB3.1 U1_1.36 | length 573.1
  Top Layer w10: SB3.1@465,460 915,460 968.15,513.15 U1_1.36@968.15,561.1
PRS_AD: 
RTS1: P2.6 P4.2 P102.6 P106.2 | length 878.6
  Top Layer w10: P4.2@2355,2860 2405,2860 2435,2890 2435,3080 ; 2435,3050 2460,3075 2460,3150 P2.6@2505,3195
  Bottom Layer w10: P106.2@945,2155 945,2145 985,2105 995,2095 995,2030 1045,1980 1090,1980 1125,1945 1125,1920 1140,1905 P102.6@1205,1905
RTS2/ADCIN1: U1_1.11
RX0: P1_1.9 P5.3 P101.9 P104.3 | length 818.6
  Top Layer w10: P101.9@105,2205 180,2205 210,2175 210,2095 255,2050 270,2050 300,2020 300,1940 P104.3@350,1890 ; P1_1.9@1405,3495 1450,3495 1475,3470 1475,3420 1540,3355 1540,3235 P5.3@1535,3230
RX1: P2.9 P3.3 P102.9 P105.3 | length 863.7
  Top Layer w10: P105.3@1045,1830 1105,1830 1135,1860 1135,2160 1180,2205 P102.9@1205,2205 ; P3.3@2265,3245 2265,3256.72 2318.28,3310 2365,3310 2430,3375 2430,3405 2495,3470 P2.9@2495,3495
RX_LED: LD1_1.1 U1_2.22 | length 767.4
  Top Layer w10: 1535,3740 LD1_1.1@1545,3750 ; LD1_1.1@1535,3770 1535,3455 1710,3280 1710,3205 1742.8,3172.2 U1_2.22@1812.2,3172.2
RXD: LD1_2.1 U1_3.3 U2_3.3 | length 879.1
  Top Layer w10: U2_3.3@3011.06,1038.98 3163.98,1038.98 v1(3165,1040) 3165,1195 3165,1220 3175,1230 LD1_2.1@3195,1230
  Bottom Layer w10: v1(3165,1040) 3165,905 3238.82,831.18 U1_3.3@3510,831.18
RXD1: U1_1.31
RXD2: U1_1.13
SCK: M1.5 M401.5 M402.5 P401.3 U1_3.15 | length 1133.1
  Top Layer w10: M1.5@3571.23,913.11 v1@3646.89,913.11
  Top Layer w15: P401.3@105,2865 250,2865 315,2930 315,3035 340,3060 565,3060 582.5,3042.5 ; M402.5@615,2900 600,2900 565,2935 565,3025 582.5,3042.5 ; M401.5@661.89,3136.23 661.89,3096.89 625,3060 600,3060 582.5,3042.5
  Bottom Layer w10: v1(3655,915) 3662.05,907.95 U1_3.15@3761.97,907.95
SCL: 
SCL1: U1_1.45
SCL2: U1_1.21
SDA: 
SDA1: U1_1.46
SDA2: U1_1.22
SPI1MISO: U1_1.16
SPI1MOSI: U1_1.17
SPI1NSS: U1_1.14
SPI1SCK: U1_1.15
STLINK_RX: U2.13 W2.2 W4.2 | length 3247.8
  Top Layer w8: W4.2@3243,1425 3280,1425 3285,1420 ; U2.13@3251.76,1735.13 3280,1706.89 3280,1670.49 3315,1635.49 3315,1480 3285,1450 3285,1420 ; W2.2@3653,2547 3653,2562 3630,2585 2690,2585 2645,2540 2645,1540 2850,1335 3256.21,1335 3292,1370.79 3292,1413 3285,1420
STLINK_TX: U2.12 W1.2 W3.2 | length 3241.8
  Top Layer w8: W3.2@2894,1408 2865,1437 2865,1455 ; W3.2@2899.5,1427.5 W3.2@2912,1415 ; U2.12@3168.24,1735.13 3145,1711.89 3145,1695 3170,1670 3254.49,1670 3269.49,1655 3270,1655 3295,1630 3295,1535 3260,1500 2970,1500 2925,1455 2865,1455 ; W1.2@3648,2460 3648,2428 3635,2415 3395,2415 3360,2450 3360,2550 3340,2570 2700,2570 2660,2530 2660,1565 2770,1455 2865,1455
STM_JTCK: U2.37
STM_JTMS: U2.34
STM_RST: C6.2 R14.1 U2.7 | length 459
  Top Layer w8: U2.7@3098.65,1804.73 3035,1741.08 3035,1665 3089.22,1610.78 3129.22,1610.78 3190,1550 C6.2@3202.5,1550 R14.1@3257.5,1605
SWCLK: CN2_1.4 CN3_1.9 R8_1.1 U1_1.37 | length 2330.9
  Top Layer w10: CN3_1.9@240,585 280,585 300,605 300,705 340,745 460,745 R8_1.1@495,780 540,825 540,1015 510,1045 430,1045 400,1075 400,1175 420,1195 CN2_1.4@465,1195
  Bottom Layer w10: CN3_1.9@240,585 190,535 190,445 200,435 310,435 372.5,372.5 667.5,372.5 695,345 1065,345 1153.15,433.15 U1_1.37@1296.1,433.15
SWDIO: CN2_1.3 CN3_1.7 R7_1.1 U1_1.34 | length 1964.4
  Top Layer w10: CN3_1.7@240,485 285,485 350,550 350,620 365,635 450,635 495,680 R7_1.1@495,705 520,705 560,745 560,1070 535,1095 CN2_1.3@465,1095
  Bottom Layer w10: CN3_1.7@240,485 305,485 390,400 675,400 710,365 1025,365 1168.15,508.15 U1_1.34@1168.15,521.73
SWIM: P1_2.2 P303.3 R4.1 R7.1 R17.2 R18.1 U1_3.18 U2.22 U2.45 U301.18 | length 1527.5
  Top Layer w8: R7.1@2949.45,2060.55 2959.45,2060.55 2975,2045 3025,2045 3025.2,2045.2 U2.45@3056.89,2013.52 ; R7.1@2949.45,2065.55 2904.45,2065.55 2860.56,2109.45 R4.1@2814.45,2109.45 2814.45,2154.45 2850.55,2190.55 R17.2@2900.56,2190.55 2895,2196.11 2895,2235 2930.56,2270.56 R18.1@2990.55,2270.56 ; v2(3245,1960) 3275,1930 3307.44,1930 U2.22@3377.03,1860.4
  Top Layer w10: P303.3@3320,2685 P303.3@3323.98,2688.98 ; v1(3323.98,2885) U301.18@3323.98,3006.73
  Bottom Layer w8: v2(3005,2040) 3120,2040 3125,2045 3210,2045 3230,2025 3230,1975 v2(3245,1960)
  Bottom Layer w10: P303.3@3320,2685 3323.98,2688.98 v1(3323.98,2885) ; U1_3.18@3761.97,831.18 3821.18,831.18 P1_2.2@3875,885
SWIM_IN: R17.1 U2.21 U2.43 U2.46 | length 732.2
  Top Layer w8: R17.1@2939.45,2229.45 2975.56,2229.45 3060,2145 3060,2066.08 U2.43@3084.73,2041.36 3110,2016.08 ; U2.46@3042.97,1999.6 3067.56,1975 3085,1975 3110,2000 3110,2016.08 ; U2.21@3363.11,1846.48 3299.6,1910 3250,1910 3143.92,2016.08 3110,2016.08
SWIM_PU: R4.2 U2.4 | length 450.8
  Top Layer w8: R4.2@2775.56,2070.55 2775.56,2019.44 2865,1930 2865,1895 2945.13,1814.87 3025.28,1814.87 U2.4@3056.89,1846.48
SWIM_RST: R19.2 R22.1 U2.42 | length 282.4
  Top Layer w8: R19.2@3040.55,2229.45 3029.45,2218.34 3029.45,2196.77 3075,2151.21 3075,2078.92 U2.42@3098.65,2055.28
  Top Layer w10: R19.2@3044.45,2225.55 R22.1@3119.45,2225.55
SWIM_RST_IN: R19.1 U2.41 | length 135.1
  Top Layer w8: R19.1@3079.45,2190.55 3090,2180 3090,2091.76 U2.41@3112.56,2069.19
T_JTCK: R8.2 U2.15 U2.26 | length 951
  Top Layer w8: U2.15@3279.6,1762.97 3332.56,1710 3655,1710 3690,1745 3690,1837.5 R8.2@3662.5,1865 ; U2.26@3390.95,1985.68 3369.48,1964.2 3369.48,1946.52 3380,1936 3519,1936 3585,1870 R8.2@3662.5,1870
T_JTDI: U2.17
T_JTDO: U2.16
T_JTMS: R5.2 R24.2 U2.27 | length 330
  Top Layer w7: U2.27@3377.03,1999.6 3427.88,2050.45 R24.2@3429.56,2050.45 ; 3443.35,2060 3510,2060 3600,1970 R5.2@3662.5,1970
T_NRST: R13.2 U2.18 | length 388.7
  Top Layer w8: U2.18@3321.36,1804.73 3396.08,1730 3622.5,1730 R13.2@3662.5,1770
T_SWDIO_IN: R24.1 U2.25 | length 80.1
  Top Layer w7: U2.25@3404.87,1971.76 3428.11,1995 3451.89,1995 R24.1@3468.45,2011.56
T_SWO: R10.2 U2.31 | length 856.7
  Top Layer w7: U2.31@3321.36,2055.28 3360,2093.92 3360,2145 v2(3370,2155) ; v2@3415,2105 3425,2095 3510,2095 3530,2075 v2(3570,2075) ; v2@3580,1675 R10.2@3662.5,1675
  Bottom Layer w7: v2(3370,2155) 3380,2155 v2(3425,2110) ; v2(3570,2075) 3570,1890 3586,1874 3586,1674 v2(3590,1670)
TEM_AD: 
TFT_CS: U1_1.43
TFT_MOSI: U1_1.41
TFT_RS/DC: U1_1.42
TFT_SCK: U1_1.39
TIM1CH1: U1_1.29
TIM2CH1: U1_1.38
TX0: P1_1.8 P5.2 P101.8 P104.2 | length 641.3
  Top Layer w10: P101.8@105,2105 135,2105 160,2105 185,2080 185,2055 185,2005 200,1990 P104.2@250,1990
  Bottom Layer w10: P1_1.8@1405,3395 1410,3395 1455,3350 1455,3220 1480,3195 1570,3195 1620,3145 P5.2@1630,3145
TX1: P2.8 P3.2 P102.8 P105.2 | length 716.1
  Top Layer w10: P105.2@945,1930 1000,1985 1085,1985 1110,2010 1110,2105 v1(1105,2105) ; P3.2@2355,3145 2407.5,3197.5 2407.5,3267.5 2440,3300 2440,3340 2495,3395 P2.8@2505,3395
  Bottom Layer w10: v1(1105,2105) P102.8@1205,2105
TX_LED: LD1_1.2 U1_2.23 | length 778.9
  Top Layer w10: LD1_1.2@1495,3745 1495,3555 1515,3535 1515,3446.72 1690,3271.72 1690,3185 1728.39,3146.61 U1_2.23@1812.2,3146.61
TXD: LD1_2.2 U1_3.2 U2_3.4 | length 880.9
  Top Layer w10: U2_3.4@3011.06,1013.39 3126.61,1013.39 v1(3135,1005) 3185,1005 3200,1020 3200,1180 LD1_2.2@3195,1185
  Bottom Layer w10: v1(3135,1005) 3135,906.72 3236.13,805.59 U1_3.2@3510,805.59
TXD1: U1_1.30
TXD2: U1_1.12
U5V: C2.2 C5.2 CN1.1 U1.1 U1.3 | length 590.1
  Top Layer w16: CN1.1@3191.12,2408.14 3310,2408.14 3315,2403.14 3315,2355 3330,2340 3365,2340 3387.5,2362.5 C2.2@3420,2362.5
  Top Layer w20: C2.2@3420,2362.5 C5.2@3470,2362.5 3497.5,2362.5 3500,2360 U1.1@3550,2360 3590,2360 3605,2345 3605,2305 3585.2,2285.2 U1.3@3550,2285.2
USB-DM: U1_1.32
USB-DP: U1_1.33
USB_DM: CN1.2 U2.32 | length 467.4
  Top Layer w8: CN1.2@3165.53,2408.14 3165.53,2359.47 3195,2330 3275,2330 3335,2270 3335,2096.76 U2.32@3307.44,2069.19
USB_DP: CN1.3 R16.1 U2.33 | length 463
  Top Layer w8: CN1.3@3139.94,2408.14 3139.94,2363.85 3188.79,2315 3250,2315 3267.5,2297.5 R16.1@3267.5,2270 ; R16.1@3275,2265 3280,2270 3305,2270 3320,2255 3320,2109.6 U2.33@3293.52,2083.11
USB_RENUMN: U2.38
VBAT: 
pads on no net: CN1_1.2 CN1_1.3 CN1_1.4 CN1_2.4 CN1_3.MH1 CN1_3.MH2 CN3_1.2 CN3_1.3 CN3_1.5 CN3_1.11 CN3_1.13 CN3_1.17 CN3_1.19 CN301.2 CN301.3 CN301.4 CN601.4 Designator4.1 Designator4.2 Designator4.3 Designator4.4 Designator4.5 Designator4.6 Designator5.1 Designator5.2 Designator5.3 Designator5.4 Designator5.5 Designator5.6 Designator5.7 Designator5.8 Designator5.9 Designator5.10 Designator5.11 Designator5.12 Designator6.1 Designator6.2 Designator6.3 Designator6.4 Designator6.5 Designator6.6 Designator6.7 Designator6.8 Designator6.9 Designator6.10 Designator6.11 Designator6.12 P1_1.2 P1_1.3 P1_1.4 P1_1.5 P1_1.6 P1_1.7 P1_1.10 P1_1.11 P1_1.12 P2.2 P2.3 P2.4 P2.5 P2.10 P2.11 P2.12 P6.3 P6.4 P6.6 P101.2 P101.3 P101.4 P101.5 P101.6 P101.7 P101.10 P101.11 P101.12 P102.2 P102.3 P102.4 P102.5 P102.10 P102.11 P102.12 P103.3 P103.4 P103.6 P302.6 P302.7 P302.12 P303.6 P401.6 P401.7 P401.8 P401.9 P402.4 P402.5 P402.6 P402.7 P402.8 P402.9 P402.10 P402.11 P402.12 P403.3 P403.4 P403.6 S1.0 S1.MH1 S1.MH2 S301.0 S301.MH1 S301.MH2 S601.0 S601.MH1 S601.MH2 U1_1.3 U1_1.4 U1_2.2 U1_2.6 U1_2.8 U1_2.9 U1_2.10 U1_2.12 U1_2.13 U1_2.14 U1_2.19 U1_2.24 U1_2.27 U1_2.28 U1_3.11 U1_3.12 U1_3.14 U1_3.19 U1_4.1 U1_4.2 U1_4.12 U1_4.13 U1_4.14 U1_4.15 U1_4.17 U1_4.18 U1_4.20 U2.11 U2.14 U2.19 U2.28 U2.29 U2.39 U2.40 U2_1.4 U2_2.4 U2_3.1 U2_3.2 U2_3.5 U2_3.14 U2_3.15 U2_3.16 U2_3.17 U2_3.18 U3.4 U102.4 U302.4
copper on no net: | length 744.2
  Bottom Layer w60: 1625,1955 ccw(c1957.5,2292.5) 2295,1960

## Polygon pours and split planes (outlines as drawn)
GND on Bottom Layer "Top Layer-No Net" (solid, remove dead copper, pour order 8): 15,2595 15,1315 1300,1315 1300,2600
GND on Bottom Layer "Top Layer-No Net" (solid, remove dead copper, pour order 23): 2625,1270 2630,1275 3925,1275 3925,625 3920,620 3915,615 2625,615
GND on Bottom Layer "Top Layer-No Net" (solid, remove dead copper, pour order 19): 1320,2600 2600,2600 2595,2605 2595,3885 1325,3885 1320,3880
GND on Bottom Layer "Top Layer-No Net" (solid, remove dead copper, pour order 26): 15,3895 15,2605 20,2610 1290,2610 1290,3885 1285,3890 1280,3895 935,3895 935,3420 940,3415 340,3415 340,3885 335,3890
GND on Bottom Layer "Top Layer-No Net" (solid, remove dead copper, pour order 20): 25,1280 2605,1280 2600,1275 2600,5 35,5 30,10
GND on Bottom Layer "Top Layer-GND" (solid, remove dead copper, pour order 28): 2630,2570 3870,2570 3870,1319.88 3865,1314.94 3860,1310 2630,1310
GND on Bottom Layer "Top Layer-GND" (solid, remove dead copper, pour order 21): 2630,2565 2635,2570 3870,2570 3870,1310 3865,1305 2630,1305
GND on Bottom Layer "Top Layer-GND" (solid, remove dead copper, pour order 24): 3885,1300 3880,1305 3880,2570 2625,2570 2625,1300
GND on Bottom Layer "Top Layer-No Net" (solid, pour order 10): 1330,1310 1330,2595 2605,2595 2605,1295 2600,1300 1330,1300
GND on Bottom Layer "Top Layer-No Net" (solid, remove dead copper, pour order 2): 2630,3905 3910,3905 3910,2625 3915,2620 2630,2620
GND on Top Layer "Top Layer-No Net" (solid, remove dead copper, pour order 6): 15,2595 6.92,2586.92 6.92,1304.21 1299.21,1304.21 1310,1315 1300,1325 1300,2600
GND on Top Layer "Top Layer-No Net" (solid, remove dead copper, pour order 18): 2625,1265 2635,1275 3925,1275 3925,615 3915,605 2620,605
GND on Top Layer "Top Layer-No Net" (solid, remove dead copper, pour order 15): 1315,3885 2595,3885 2600,3880 2600,2600 1325,2600 1315,2610
GND on Top Layer "Top Layer-No Net" (solid, remove dead copper, pour order 22): 15,3895 335,3895 335,3420 340,3415 350,3405 945,3405 945,3885 955,3895 1290,3895 1290,2595 1280,2605 10,2605
GND on Top Layer "Top Layer-No Net" (solid, remove dead copper, pour order 16): 10,1280 2595,1280 2600,1285 2605,1280 2605,0 25,0 15,10 15,5
GND on Top Layer "Top Layer-GND" (solid, remove dead copper, pour order 27): 2644.76,2570 2635,2560.2 2635,1315 3865.12,1315 3870,1319.9 3870,2570
GND on Top Layer "Top Layer-GND" (solid, remove dead copper, pour order 17): 2630,2570 3875,2570 3875,1305 2630,1305
GND on Top Layer "Top Layer-GND" (solid, remove dead copper, pour order 25): 3880,2570 2620,2570 2620,1300 3880,1300
GND on Top Layer "Top Layer-No Net" (solid, pour order 8): 1327.5,2592.5 1327.5,1307.5 1325,1305 1335,1295 2605,1295 2605,2585 2615,2595
GND on Top Layer "Top Layer-No Net" (solid, remove dead copper, pour order 4): 2630,3900 2635,3905 3910,3905 3910,2620 2630,2620

## Keep-outs
Keep-Out Layer:
  lines w5: 5370.91,2490.87 5370.91,2490.87
  lines w8: 2620,-15 2620,595 2625,600 3925,600 ; 3925,600 3925,600
  lines w10: 0,0 0,3905 3925,3905 3925,600 ; 0,1295 5,-15 2620,-15

## Other copper
Bottom Layer:
  text "i   i" at 2330,2220 h180
  text "W" at 1790,2015 h480
  text "Wikiot Dev Kit" at 2330,1685 h60

## Silkscreen, mask and mechanical layers (free items; w line width, h text height)
Top Overlay:
  rectangle: 2205,330 2255,385
  lines w8: 1530,3325 1630,3325 ; 1705,3120 1705,3170 1730,3195 1730,3245 ; 2160,2850 2160,2900 2185,2925 2185,2975 ; 2165,3130 2165,3180 2190,3205 2190,3255 ; 2255,3040 2355,3040 ; 2260,3320 2360,3320
  lines w10: 5,1300 1305,1300 ; 5,2605 1305,2605 ; 192,2635 ccw(c247,2687) 299,2632 ; 201.28,1388.58 ccw(c256.28,1440.58) 308.28,1385.58 ; 207.56,2070.81 382.56,2070.81 ; 430,2040 430,1965 470,1925 470,1855 ; 819.61,1976.55 819.61,1901.55 859.61,1861.55 859.61,1791.55 ; 825,2195 825,2120 865,2080 865,2010 ; 902.56,2235.81 1077.56,2235.81 ; 907.56,1750.81 1082.56,1750.81 ; 1305,2590 1305,3890 ; 1305,2595 1305,3895 ; 1310,2600 1310,1300 2610,1300 ; 1310,2605 2610,2605 2610,3905 ; 1498.34,2660 ccw(c1553.34,2712) 1605.34,2657 ; 2610,0 2610,1300 ; 2610,2600 2610,1300 ; 2615,2605 3905,2605 ; 2620,2605 3920,2605 ; 2826.28,2663.58 ccw(c2881.28,2715.58) 2933.28,2660.58 ; 3637,1420 ccw(c3692,1472) 3744,1417 ; 3920,1300 2610,1300 ; 1305,2600 1305,3900 1305,2600
  text "T" at 1480,3680 h40
  text "R" at 1525,3680 h40
  text "INT0" at 320,3585 h40 r90
  text "FT_VCCIO" at 1475,3530 h40
  text "3V3<->5V" at 1470,3470 h40
  text "H" at 960,3440 h80
  text "N" at 1135,3180 h80
  text "MOSI" at 170,3045 h40
  text "MISO" at 170,2940 h40
  text "PWR OUT" at 1510,2905 h40
  text "FT<->LDO" at 1495,2850 h40
  text "SCK" at 175,2845 h40
  text "CE" at 1055,2780 h40 r90
  text "Wikiot-FT232" at 1710,2770 h40
  text "Wikiot-STM8S20P" at 3030,2755 h33.46
  text "CSN" at 175,2750 h40
  text "Wikiot-nRF24L01" at 400,2735 h33.46
  text "i i" at 2815.28,2696.58 h60
  text "i i" at 1487.34,2693 h60
  text "A1" at 2310,2675 h40
  text "W" at 2853.28,2673.58 h80
  text "W" at 1525.34,2670 h80
  text "A1" at 3630,2670 h39.37
  text "i i" at 181,2668 h60
  text "A2" at 1020,2650 h39.37
  text "W" at 219,2645 h80
  text "TX" at 3680,2525 h40
  text "NC" at 2360,2445 h40
  text "IO0" at 1510,2440 h40
  text "RX" at 3690,2440 h40
  text "T" at 435,2420 h40
  text "R" at 480,2420 h40
  text "IO1" at 1510,2340 h40
  text "AIN7" at 2290,2335 h40
  text "RX1" at 955,2310 h40
  text "5V" at 725,2265 h40
  text "3V3" at 265,2260 h40
  text "TX1" at 955,2250 h40
  text "IO2" at 1510,2240 h40
  text "AIN6" at 2290,2240 h40
  text "PWR-SWD" at 3370,2220 h40
  text "RX0" at 178.31,2185.07 h40
  text "RX0" at 1510,2145 h40
  text "AIN5/RX1" at 2150,2140 h40
  text "TX0" at 172.5,2092.5 h40
  text "TX0" at 1510,2040 h40
  text "AIN4/TX1" at 2150,2040 h40
  text "SCL" at 1510,1945 h40
  text "AIN3/CTS1" at 2135,1940 h40
  text "SDA" at 1510,1845 h40
  text "AIN2/RTS1" at 2140,1840 h40
  text "AIN1" at 2305,1750 h40
  text "IO3/MOSI" at 1510,1745 h40
  text "CTS1" at 930,1665 h40
  text "IO4/MISO" at 1510,1645 h40
  text "AIN0" at 2290,1645 h40
  text "SWIM" at 2695,1615 h40 r270
  text "RTS1" at 930,1605 h40
  text "V3" at 270,1590 h40
  text "PWR-SWIM" at 3355,1580 h40
  text "IO8/T1" at 2230,1545 h40
  text "IO5/SCK" at 1510,1540 h40
  text "SWD" at 3840,1515 h40 r90
  text "Wikiot-Power&CH340T" at 350,1470 h33.46
  text "i i" at 3626,1453 h60
  text "BAT" at 1840,1450 h40 r90
  text "NRST" at 1902,1450 h40 r90
  text "CLK" at 1964,1450 h40 r90
  text "DATA" at 2026,1450 h40 r90
  text "GND" at 2088,1450 h40 r90
  text "VDD" at 2150,1450 h40 r90
  text "IO6/SS" at 1510,1445 h40
  text "IO7/T0" at 2215,1440 h40
  text "W" at 3664,1430 h80
  text "i i" at 190.28,1421.58 h60
  text "Rev.A3" at 3305,1400 h39.37
  text "W" at 228.28,1398.58 h80
  text "A1" at 1010,1385 h39.37
  text "GND" at 2325,1350 h40
  text "TX" at 3195,1350 h40
  text "GND" at 1515,1345 h40
  text "RX" at 2890,1345 h40
  text "ST-LINK-Wiki" at 3300,1315 h50
  text "K" at 370,1175 h40
  text "D" at 370,1075 h40
  text "G" at 370,975 h40
  text "V" at 370,865 h40
  text "0" at 2205,175 h50
  text "F0 -/" at 375,120 h40
  text "-" at 2210,115 h50
  text "+" at 2570,110 h50
  text "F1 --" at 375,65 h40
  text "1" at 2215,35 h50
  text "F3 --" at 375,10 h40
Bottom Overlay:
  lines w10: 2016,1122 ccw(c2068,1177) 2123,1125
  text "H" at 3765,3580 h80
  text "N" at 3405,3540 h80
  text "H" at 795,2385 h80
  text "N" at 435,2345 h80
  text "N" at 2785,2320 h80
  text "H" at 2965,2295 h80 r90
  text "VDD" at 3755,2165 h40
  text "GND" at 3760,2075 h40
  text "SWIM_RST" at 3055,1980 h40
  text "SWIO" at 3765,1970 h40
  text "SWIM" at 2900,1875 h40
  text "SWCLK" at 3765,1870 h40
  text "GND" at 2870,1775 h40
  text "NRST" at 3765,1775 h40
  text "VDD" at 2870,1670 h40
  text "SWO" at 3765,1670 h40
  text "H" at 2200,1470 h80
  text "N" at 1720,1435 h80
  text "STM32-Flasher" at 1965,1195 h40
  text "i i" at 2134,1158 h60
  text "W" at 2096,1135 h80
  text "Rev.A1" at 1960,1105 h40
  text "H" at 2145,1025 h80 r90
  text "N" at 1745,815 h80
Bottom Solder:
  lines w60: 1625,1955 ccw(c1957.5,2292.5) 2295,1960
  text "i   i" at 2330,2220 h180
  text "W" at 1790,2015 h480
  text "Wikiot Dev Kit" at 2330,1685 h60